# EAGLE board 1IRTG4=Pittonet Benjamin PIC (EAGLE 7.7.0)
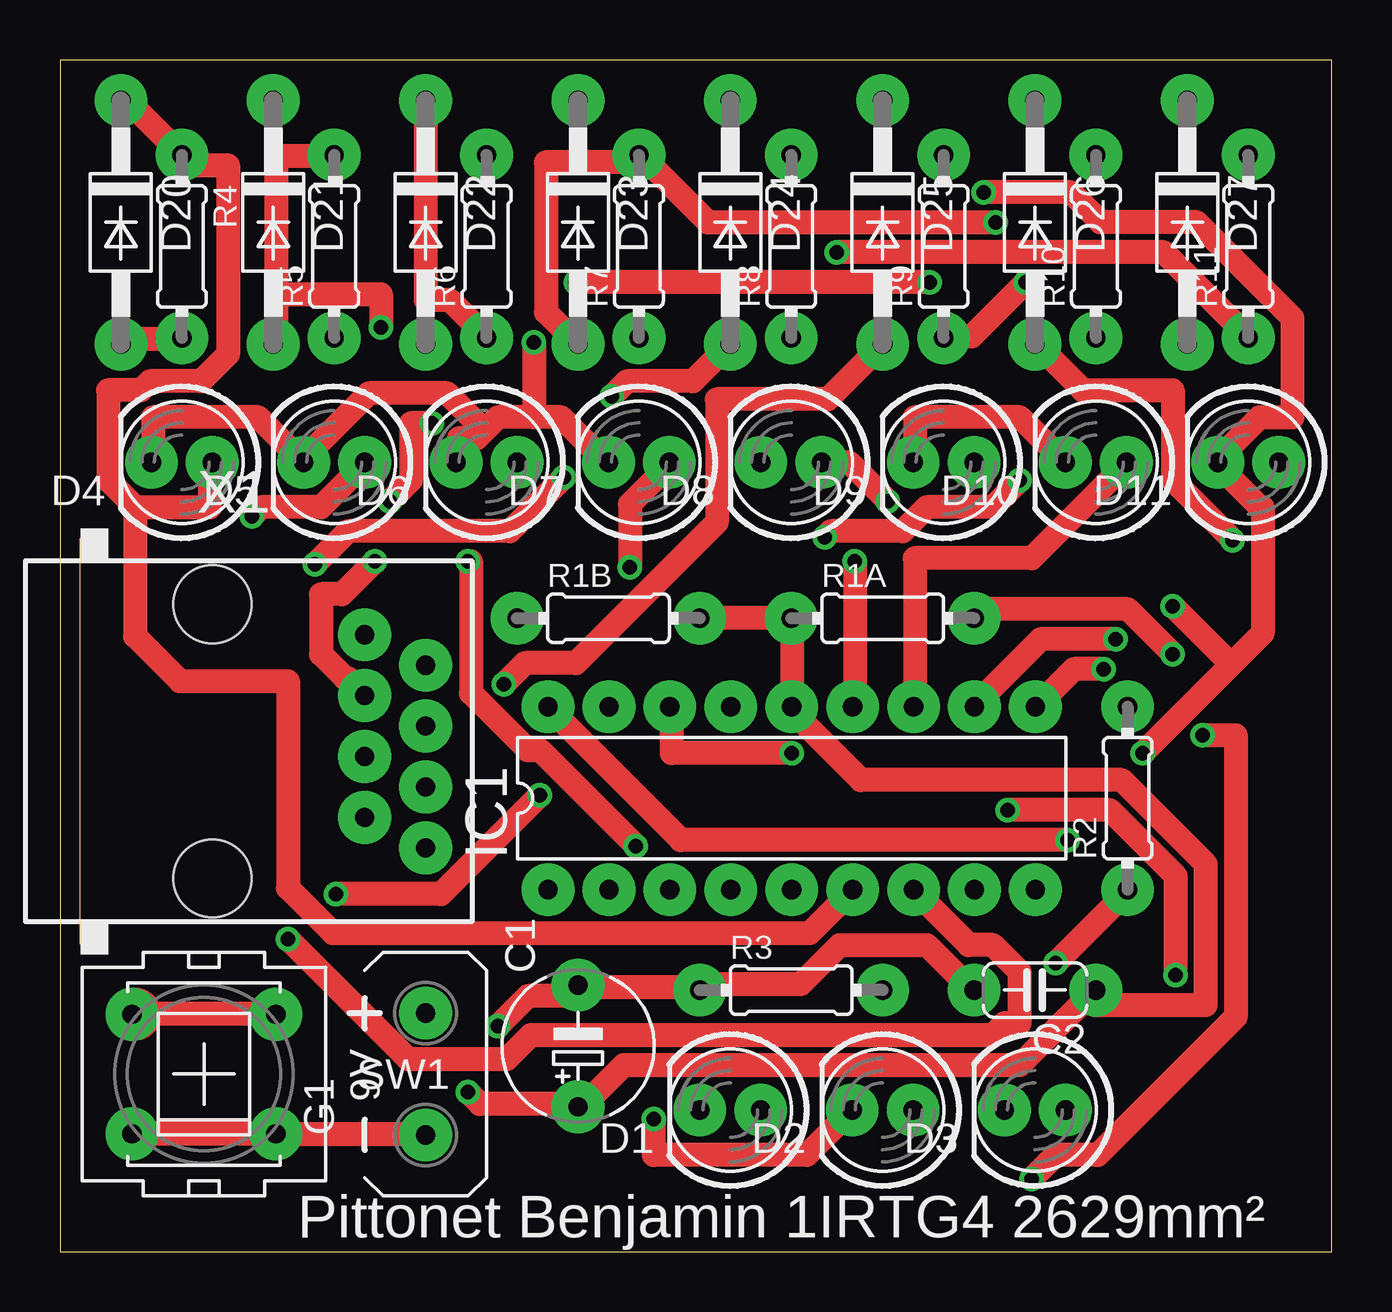
[diagram p0: board, top side]
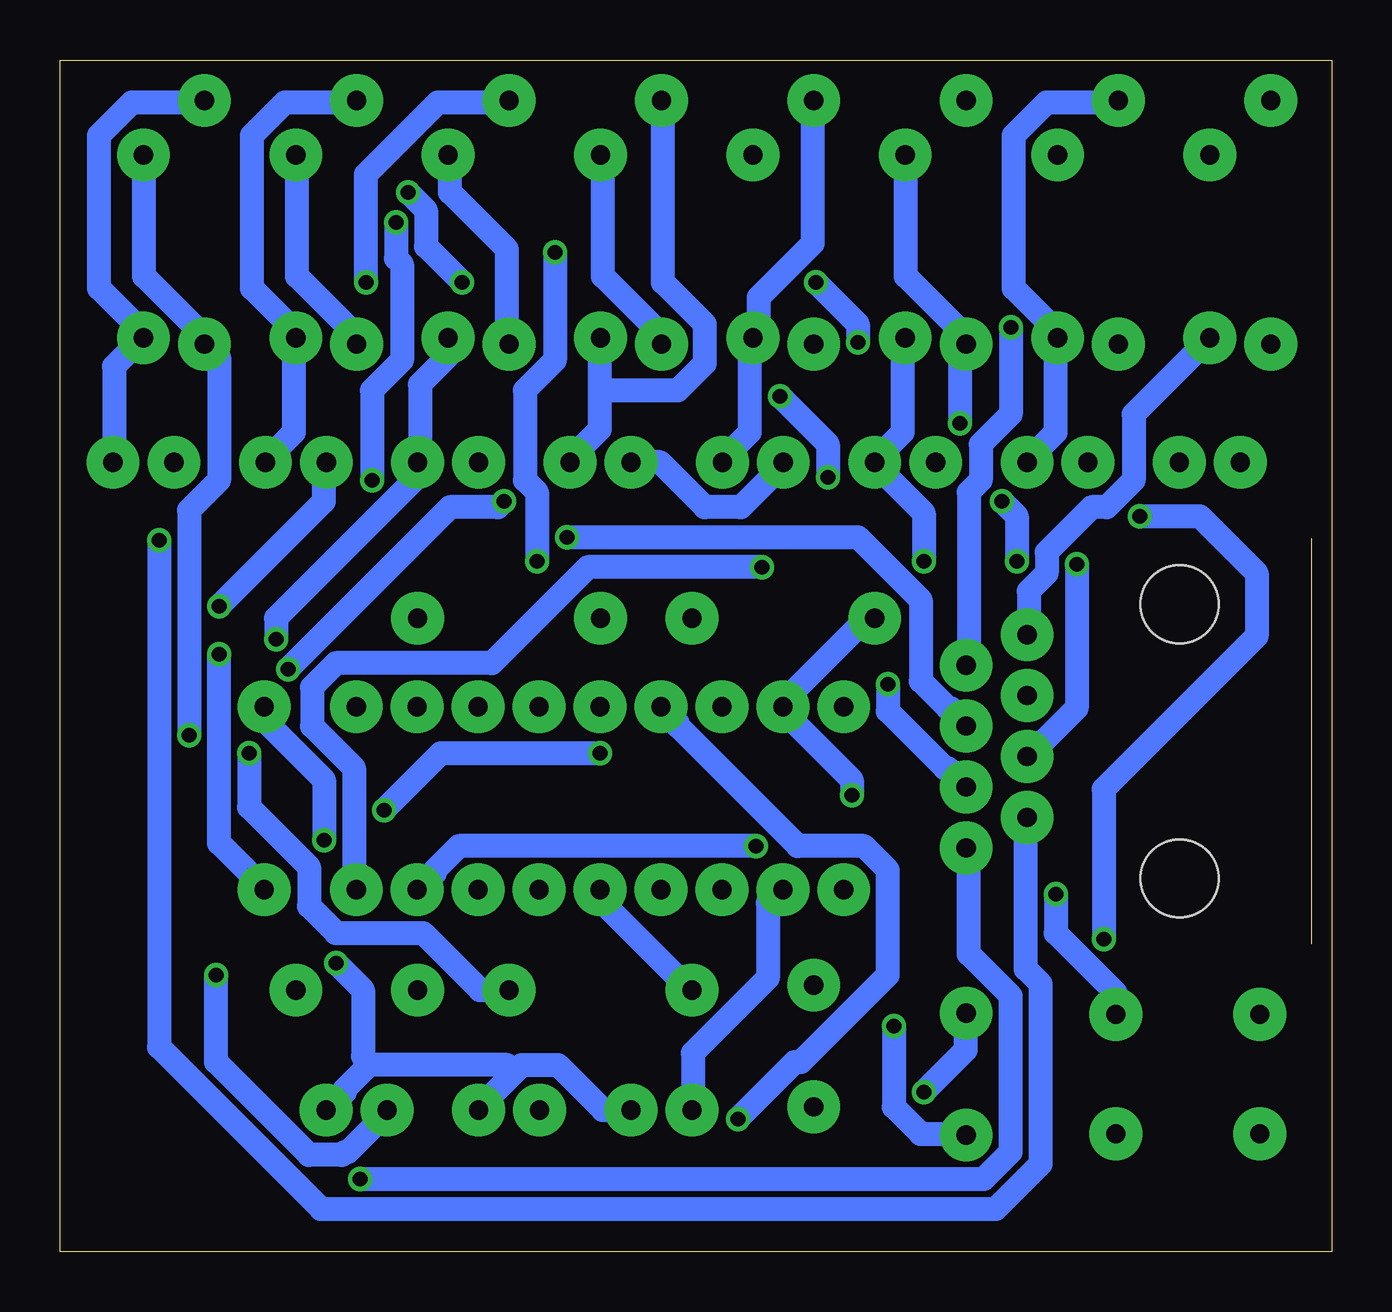
[diagram p1: board, bottom side, seen from below]

Size 53.01 x 49.67 mm. Coordinates in mm from the lower left corner, seen from the top.
Outline: 0,0 53.01,0 53.01,49.67 0,49.67 0,0
Copper layers (1*16): Top 0.035mm / dielectric 1.5mm / Bottom 0.035mm
Design rules "default": minimum track width 10mil, minimum drill 24mil, track to track 8mil, track to pad 8mil, pad to pad 8mil, via to via 8mil, smd to smd 8mil, copper to edge 40mil, drill to drill 8mil, minimum pad ring 10mil, minimum via ring 8mil, stop-mask expansion 4mil, vias tented up to drill 0mil, thermal gap 10mil
Net classes: 0 default: width 1 mm, drill 0.6 mm, clearance 0.2 mm

## Footprints (pad centres in the part's own frame; a part is rotated, then mirrored left to right if it is on the bottom)
E5-6 = drill 0.8 pad 2.2: + -2.54,0; - 2.54,0
C050-024X044 = drill 0.8 pad 2.2: 1 -2.54,0; 2 2.54,0
LED5MM = drill 0.8 pad 2.2: A -1.27,0; K 1.27,0
DO41-10 = drill 0.8 pad 2.2: A 5.08,0; C -5.08,0
AB9V = drill 0.8 pad 2.2: + 0,2.54; - 0,-2.54
DIL18 = drill 0.8 pad 2.2: 1 -10.16,-3.81; 2 -7.62,-3.81; 3 -5.08,-3.81; 4 -2.54,-3.81; 5 0,-3.81; 6 2.54,-3.81; 7 5.08,-3.81; 8 7.62,-3.81; 9 10.16,-3.81; 10 10.16,3.81; 11 7.62,3.81; 12 5.08,3.81; 13 2.54,3.81; 14 0,3.81; 15 -2.54,3.81; 16 -5.08,3.81; 17 -7.62,3.81; 18 -10.16,3.81
0204/7 = drill 0.8 pad 2.2: 1 -3.81,0; 2 3.81,0
PVA1R = drill 0.8 pad 2.2: 1 -2.997,2.489; 2 -2.997,-2.489; 3 2.997,2.489; 4 2.997,-2.489
RJ45-NO-SHIELD = drill 0.8 pad 2.2: 1 -4.445,6.35; 2 -3.175,8.89; 3 -1.905,6.35; 4 -0.635,8.89; 5 0.635,6.35; 6 1.905,8.89; 7 3.175,6.35; 8 4.445,8.89 | hole 3.251: -5.715,0; 5.715,0

## Placement (x,y rotation side)
C1  100µ  [E5-6]  21.59,8.57 90 top
C2  100n  [C050-024X044]  40.64,10.9 180 top
D1  [LED5MM]  27.94,5.9 180 top
D2  [LED5MM]  34.29,5.9 180 top
D3  [LED5MM]  40.64,5.9 180 top
D4  [LED5MM]  5.08,32.9 180 top
D5  [LED5MM]  11.43,32.9 180 top
D6  [LED5MM]  17.78,32.9 180 top
D7  [LED5MM]  24.13,32.9 180 top
D8  [LED5MM]  30.48,32.9 180 top
D9  [LED5MM]  36.83,32.9 180 top
D10  [LED5MM]  43.18,32.9 180 top
D11  [LED5MM]  49.53,32.9 180 top
D20  1N4004  [DO41-10]  2.54,42.9 270 top
D21  1N4004  [DO41-10]  8.89,42.9 270 top
D22  1N4004  [DO41-10]  15.24,42.9 270 top
D23  1N4004  [DO41-10]  21.59,42.9 270 top
D24  1N4004  [DO41-10]  27.94,42.9 270 top
D25  1N4004  [DO41-10]  34.29,42.9 270 top
D26  1N4004  [DO41-10]  40.64,42.9 270 top
D27  1N4004  [DO41-10]  46.99,42.9 270 top
G1  AB9V  [AB9V]  15.24,7.4 0 top
IC1  PIC16F627P  [DIL18]  30.5,18.9 0 top
R1A  720  [0204/7]  34.29,26.4 0 top
R1B  720  [0204/7]  22.86,26.4 0 top
R2  10k  [0204/7]  44.5,18.9 90 top
R3  [0204/7]  30.48,10.9 0 top
R4  [0204/7]  5.08,41.9 270 top
R5  [0204/7]  11.43,41.9 90 top
R6  [0204/7]  17.78,41.9 90 top
R7  [0204/7]  24.13,41.9 90 top
R8  [0204/7]  30.48,41.9 90 top
R9  [0204/7]  36.83,41.9 90 top
R10  [0204/7]  43.18,41.9 90 top
R11  [0204/7]  49.53,41.9 90 top
SW1  PVA1R  [PVA1R]  6,7.4 0 top
X1  RJ45-6L-B  [RJ45-NO-SHIELD]  6.35,21.27 270 top

## Library data of the parts
C1 C2 R1A R1B R2-R11 = rcl
D1-D11 = led
D20-D27 = diode
G1 = battery
IC1 = microchip; MF: MICROCHIP; MPN: PIC16F627-20I/P; OC_FARNELL: 1084298; OC_NEWARK: 23C4967
SW1 = switch-misc
X1 = con-tycoelectronics; MPN: RJ45-6L-B; OC_FARNELL: unknown; OC_NEWARK: 16R6090

## Nets
N$1: D21.A R5.2 X1.2
N$2: D4.K D5.K D6.K D7.K D8.K D9.K D10.K D11.K R3.2
N$3: D4.A D20.C IC1.6 R4.1
N$4: D3.K IC1.16
N$5: D2.K IC1.15
N$6: D1.K IC1.2
N$7: D1.A D2.A D3.A R1A.2 R2.1
N$8: IC1.18 R2.2
N$10: D22.A R6.2 X1.3
N$11: C1.+ C2.1 G1.+ IC1.14 R1A.1 R1B.2
N$12: D20.A R4.2 X1.1
N$13: D23.A R7.2 X1.4
N$14: IC1.17 R1B.1 SW1.1 SW1.3
N$15: D25.A R9.2 X1.6
N$16: D26.A R10.2 X1.7
N$17: D27.A R11.2 X1.8
N$18: D5.A D21.C IC1.7 R5.1
N$19: D6.A D22.C IC1.8 R6.1
N$20: D7.A D23.C IC1.9 R7.1
N$21: D8.A D24.C IC1.10 R8.1
N$22: D9.A D25.C IC1.11 R9.1
N$23: D10.A D26.C IC1.12 R10.1
N$24: D11.A D27.C IC1.13 R11.1
N$25: D24.A R8.2 X1.5
N$26: C1.- C2.2 G1.- IC1.5 R3.1 SW1.2 SW1.4

## Tracks (layer width: path | path; a pad name or v marks a point on that pad's centre or on a via)
N$1  (via drill 0.61)
  Top 1: 9,39.9 9,45.65 11.38,45.65 R5.2 | 9,39.9 9,37.9 D21.A | v13.38,38.52 13.38,39.9 9,39.9
  Bottom 1: v13.38,38.52 13.38,34.9 14.62,33.65 14.62,32.15 15.12,31.65 15.12,24.52 X1.2
N$2  (via drill 0.61)
  Top 1: D4.K 3.88,32.9 3.88,34.77 8.25,34.77 10.12,32.9 D5.K 10.38,33.27 12.88,35.77 16.12,35.77 17.69,34.21 | 17.69,34.21 18.25,34.77 19.75,34.77 | 17.69,34.21 17.38,33.9 16.62,33.9 16.62,32.9 D6.K | 19.75,34.77 20.88,34.77 22.75,32.9 D7.K | D9.K 35.62,32.9 35.62,34.77 40,34.77 41.88,32.9 D10.K | 48.81,24.46 50.12,25.77 50.12,31.02 50,31.02 48.38,32.65 48.38,32.9 D11.K 48.5,33.27 50,34.77 51.38,34.77 51.38,38.9 47.38,42.9 43.38,42.9 42.12,44.15 v38.5,44.15 | 48.81,24.46 v45.12,20.77 | 48.81,24.46 v46.38,26.9 | v19.75,37.9 19.75,34.77 | v36.25,40.4 v21.5,40.4
  Bottom 1: D8.K 28,32.9 26.12,31.02 24.62,31.02 22.75,32.9 D7.K | R3.2 35.5,10.9 37.88,13.27 41.5,13.27 42.62,14.4 42.62,16.02 45.12,18.52 v45.12,20.77 | v46.38,26.9 42,31.27 42,32.9 D10.K | v19.75,37.9 19.75,38.65 v21.5,40.4 | v36.25,40.4 37.75,41.9 37.75,43.4 v38.5,44.15
N$3
  Top 1: D20.C 2.62,47.9 2.88,47.9 5,45.77 R4.1 5.25,45.27 7,45.27 7,37.4 5.88,36.27 3.75,36.27 3.38,35.9 2,35.9 2,32.15 3.12,31.02 | 3.12,31.02 6.25,31.02 6.25,32.9 D4.A | 3.12,31.02 3.12,25.65 5,23.77 9.5,23.77 9.5,15.15 11.38,13.27 31.25,13.27 33,15.02 IC1.6
N$4  (via drill 0.61)
  Top 1: v30.5,20.77 25.5,20.77 25.5,22.65 IC1.16 | v39.5,18.4 43.75,18.4 46.5,15.65 v46.5,11.52
  Bottom 1: v30.5,20.77 37.12,20.77 v39.5,18.4 | v46.5,11.52 46.5,7.9 42.62,4.02 41.25,4.02 41.12,4.15 41,4.15 39.25,5.9 D3.K
N$5  (via drill 0.61)
  Top 1: v24.75,5.52 24.75,4.02 31.12,4.02 33,5.9 D2.K
  Bottom 1: v24.75,5.52 22.38,7.9 22.12,7.9 18.5,11.52 18.5,15.9 19.5,16.9 22.25,16.9 27.25,21.9 27.25,22.02 27.88,22.65 IC1.15
N$6
  Bottom 1: D1.K 26.62,5.9 26.62,8.27 23.5,11.4 23.5,14.52 23,15.02 IC1.2
N$7  (via drill 0.61)
  Top 1: v46.38,24.9 44.5,26.77 38.5,26.77 38.12,26.4 R1A.2 | v41.5,12.02 44.5,15.02 R2.1
  Bottom 1: D1.A 30.38,5.9 32.25,7.77 33.75,7.77 34.06,7.46 | 34.06,7.46 35.62,5.9 D2.A | 40.12,7.77 41.12,6.77 41.12,6.65 41.88,5.9 D3.A | 40.12,7.77 34.38,7.77 34.06,7.46 | v46.38,24.9 46.38,17.02 44.5,15.15 R2.1 | v41.5,12.02 40.38,10.9 40.38,8.15 40.12,7.77
N$8  (via drill 0.61)
  Top 1: v42,17.15 25.88,17.15 20.38,22.65 IC1.18
  Bottom 1: v42,17.15 42,19.65 44.5,22.15 R2.2
N$10  (via drill 0.61)
  Top 1: v13.12,28.77 11.75,27.4 10.88,27.4 10.88,24.9 11.88,23.9 12,23.9 12.62,23.27 X1.3 | v13.75,31.27 14.62,32.15 14.62,34.52 v15.5,34.52
  Bottom 1: v13.12,28.77 13.12,30.65 v13.75,31.27 | v15.5,34.52 15.5,37.52 15.25,37.77 D22.A 15.38,38.27 17.75,40.65 17.75,45.65 R6.2
N$11  (via drill 0.61)
  Top 1: R1B.2 R1A.1 30.5,26.02 IC1.14 30.75,22.27 33.38,19.65 44.25,19.65 47.75,16.15 47.75,10.27 43.12,10.27 C2.1 43.12,10.9 40,7.77 23.5,7.77 22,6.27 C1.+ 21.5,6.15 17.5,6.15 v17,6.65
  Bottom 1: v17,6.65 15.25,8.4 15.25,9.9 G1.+
N$12
  Top 1: D20.A 2.62,37.9 2.75,38.02 5,38.02 R4.2
  Bottom 1: X1.1 12.62,25.77 12.62,27.52 11.88,28.27 11.88,29.15 10,31.02 9.38,31.02 8.25,32.15 8.25,34.9 5.12,38.02 R4.2
N$13  (via drill 0.61)
  Top 1: v31.88,29.77 32.12,30.02 35.12,30.02 36.12,31.02 38.88,31.02 v40,32.15 | v39,42.9 27,42.9 24.25,45.65 R7.2 23.75,45.4 20.25,45.4 20.25,39.15 21.5,37.9 D23.A
  Bottom 1: v31.88,29.77 19.75,29.77 17.12,27.15 17.12,23.77 16,22.65 15.88,22.65 15.25,22.02 X1.4 | v40,32.15 40,35.9 38.75,37.15 38.75,41.15 39,41.4 v39,42.9
N$14  (via drill 0.61)
  Top 1: 3.12,9.9 8.88,9.9 SW1.3 | v11.5,14.9 15.88,14.9 v20,19.02
  Top 2.2: 3.12,9.9 SW1.1
  Bottom 1: R1B.1 19.38,26.4 23,22.77 IC1.17 22.62,22.27 20,19.65 v20,19.02 | v11.5,14.9 11.5,13.27 9,10.77 SW1.3
N$15  (via drill 0.61)
  Top 1: v18.5,23.65 19.38,24.52 21.5,24.52 27.38,30.4 27.38,35.52 32,35.52 34.25,37.77 D25.A
  Bottom 1: v18.5,23.65 18.5,22.52 16.12,20.15 16,20.15 15.25,19.4 X1.6 | R9.2 36.75,45.65 36.75,44.15 34.38,41.77 34.38,37.9 D25.A
N$16  (via drill 0.61)
  Top 1: v48.88,29.65 46.38,32.15 46.38,35.9 42.62,35.9 40.75,37.77 D26.A
  Bottom 1: v48.88,29.65 48.88,8.52 42.12,1.77 14,1.77 12.12,3.65 12.12,11.15 12.75,11.77 12.75,18.02 X1.7 | R10.2 43.12,45.65 43.12,40.65 40.75,38.27 40.75,37.9 D26.A
N$17  (via drill 0.61)
  Top 1: v40.5,3.02 41.5,4.02 43.25,4.02 49,9.77 49,21.52 v47.62,21.52
  Bottom 1: v40.5,3.02 14.5,3.02 13.38,4.15 13.38,10.65 15.12,12.4 15.12,16.77 X1.8 | v47.62,21.52 47.62,30.9 46.38,32.15 46.38,37.27 46.88,37.77 D27.A 47.12,38.27 49.5,40.65 49.5,45.65 R11.2
N$18  (via drill 0.61)
  Top 1: v9.5,13.02 14.5,8.02 18.62,8.02 19.62,9.02 38.88,9.02 39.38,9.52 40,9.52 40,11.65 38.88,12.77 37.88,12.77 35.62,15.02 IC1.7 | v8,30.65 8.38,31.02 10.88,31.02 12.75,32.9 D5.A
  Bottom 1: D5.A 12.75,32.9 11.5,34.15 11.5,38.02 R5.1 11.62,38.52 13.25,40.15 13.25,46.52 11.88,47.9 9,47.9 D21.C | v9.5,13.02 9.5,19.27 3.12,25.65 3.12,28.27 5.5,30.65 v8,30.65
N$19  (via drill 0.61)
  Top 1: D22.C 15.25,47.9 15.25,39.65 16.25,39.65 17.75,38.15 R6.1 | v24,16.9 20,20.9 19.5,20.9 17.12,23.27 17.12,28.77 v17,28.77
  Bottom 1: R6.1 17.88,38.02 17.88,34.15 19.12,32.9 D6.A 18.75,32.52 17,30.77 v17,28.77 | v24,16.9 36.38,16.9 37.38,15.9 37.38,15.77 38,15.15 IC1.8
N$20  (via drill 0.61)
  Top 1: v23.75,28.52 23.75,31.15 25.5,32.9 D7.A
  Bottom 1: D7.A 25.5,32.9 24.25,34.15 24.25,38.02 R7.1 23.88,38.52 23.88,39.77 21.62,42.02 21.62,47.9 D23.C | v23.75,28.52 31,28.52 35,24.52 41.5,24.52 42.5,23.52 42.5,21.9 40.75,20.15 40.75,15.15 IC1.9
N$21  (via drill 0.61)
  Top 1: v43.5,24.27 42.25,24.27 40.75,22.77 IC1.10 | v34.5,31.27 32.88,32.9 D8.A
  Bottom 1: 30.5,35.9 30.5,34.27 31.75,33.02 D8.A | 30.5,35.9 30.5,38.02 R8.1 | v43.5,24.27 36.75,31.02 34.75,31.02 v34.5,31.27 | 30.5,35.9 27.25,35.9 26.12,37.02 26.12,38.65 27.88,40.4 27.88,47.9 D24.C
N$22  (via drill 0.61)
  Top 1: v40.25,40.4 38,38.15 36.88,38.15 R9.1 | v44,25.52 40.88,25.52 38.12,22.77 IC1.11
  Bottom 1: R9.1 36.88,38.02 36.88,37.27 38,36.15 38,32.9 D9.A 37.88,32.52 44,26.4 v44,25.52 | v40.25,40.4 40.25,44.9 37.25,47.9 34.38,47.9 D25.C
N$23
  Top 1: IC1.12 35.62,22.77 35.62,28.9 40.5,28.9 44.5,32.9 D10.A
  Bottom 1: D10.A 44.5,32.9 43.25,34.15 43.25,38.02 R10.1 43.38,38.52 45,40.15 45,46.52 43.62,47.9 40.75,47.9 D26.C
N$24  (via drill 0.61)
  Top 1: v33.12,28.77 33.12,22.77 IC1.13 | v32.38,41.65 46,41.65 49.5,38.15 R11.1
  Bottom 1: v33.12,28.77 33.12,31.65 33.62,32.15 33.62,35.9 32.38,37.15 v32.38,41.65 | D11.A 50.75,32.9 50.75,36.9 49.62,38.02 R11.1 49.75,38.52 51.38,40.15 51.38,46.52 50,47.9 47,47.9 D27.C
N$25  (via drill 0.61)
  Top 1: v10.62,28.65 12,30.02 18.75,30.02 v21,32.27 | v23,35.65 23.62,36.27 26.38,36.27 27.88,37.77 D24.A
  Bottom 1: v10.62,28.65 10.62,22.65 12.62,20.65 X1.5 | v21,32.27 21,33.65 v23,35.65 | R8.2 30.38,45.65 30.38,40.65 28,38.27 28,37.9 D24.A
N$26  (via drill 0.61)
  Top 1: SW1.2 3.12,4.9 8.88,4.9 SW1.4 9.5,4.9 15.12,4.9 G1.- | C2.2 38,10.9 36.12,12.77 32.5,12.77 30.88,11.15 27.12,11.15 R3.1 26.62,10.9 26.5,11.02 21.62,11.02 C1.- 21.25,10.65 19.5,10.65 v18.25,9.4
  Bottom 1: IC1.5 30.5,14.65 26.75,10.9 R3.1 | v18.25,9.4 18.25,6.02 17.12,4.9 15.25,4.9 G1.-

## Text on the board
tName: Pittonet Benjamin 1IRTG4 2629mm²